# EAGLE board PCB_Xbee rev0.1 (EAGLE 8.4.3)
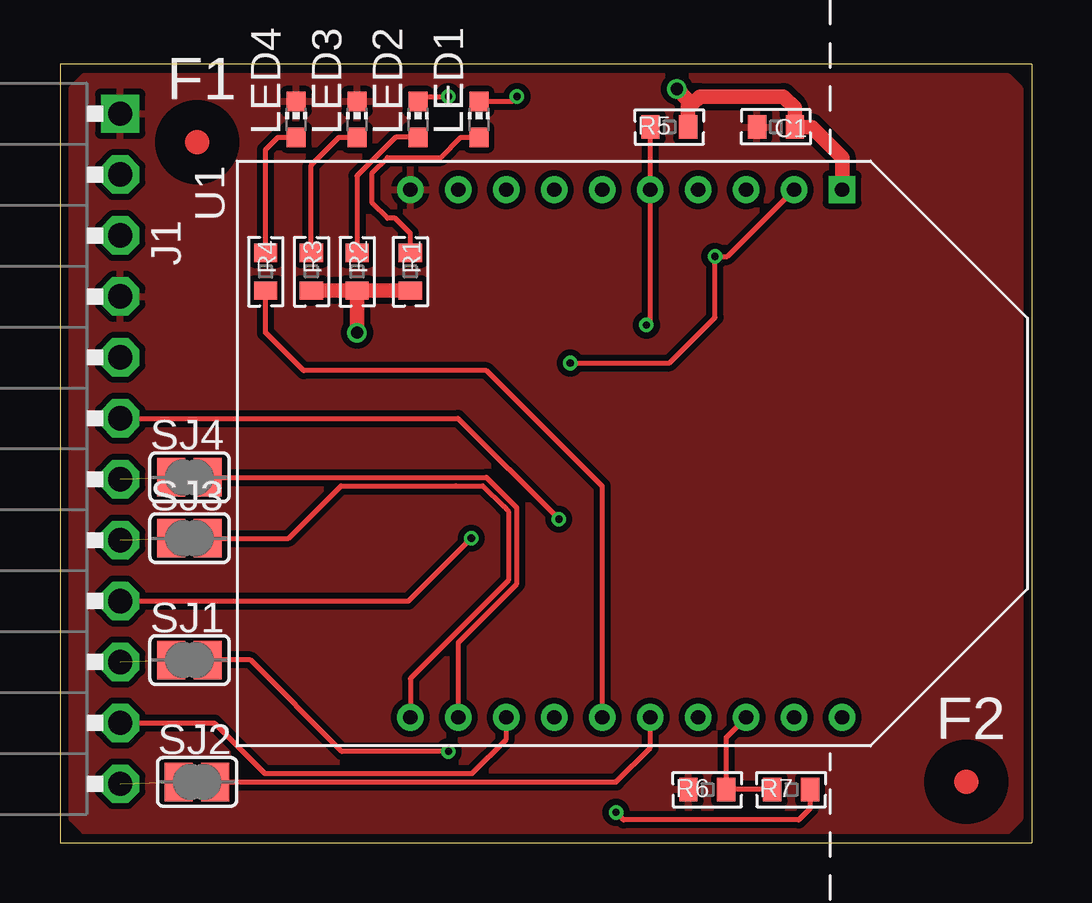
[diagram p0: board, top side]
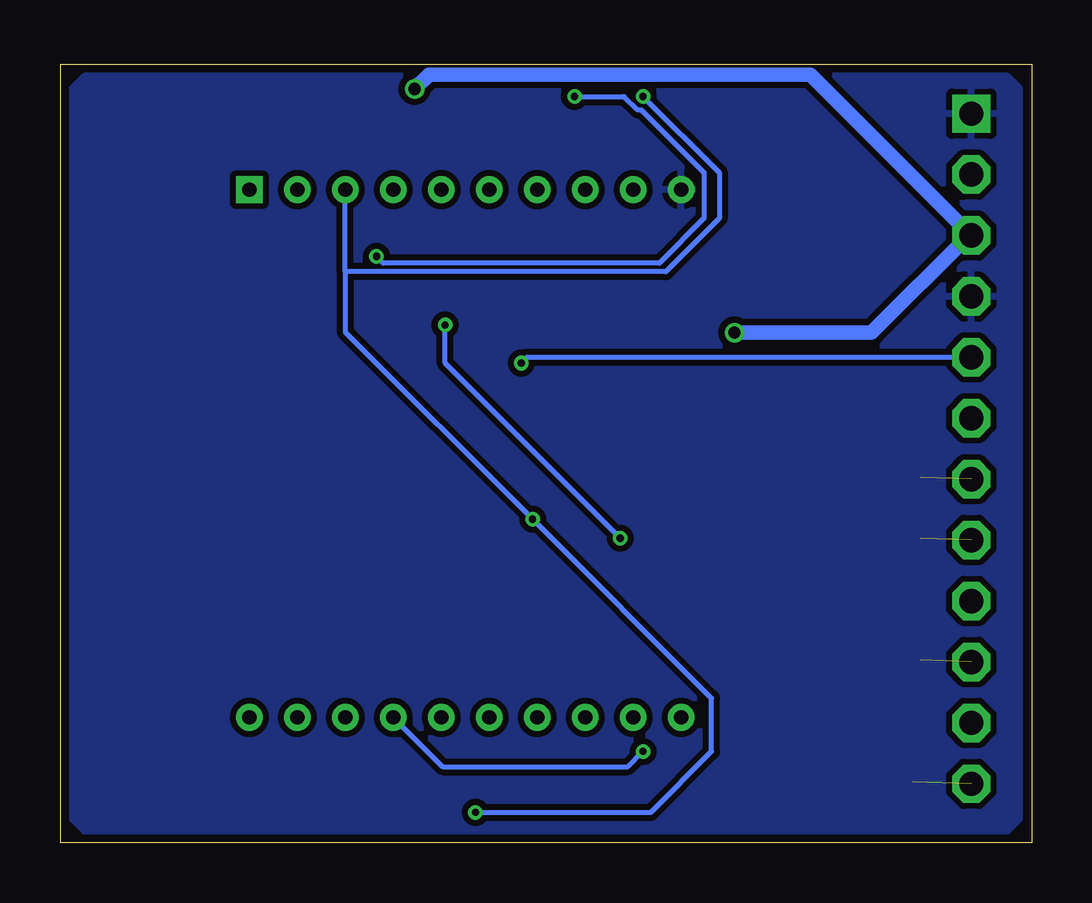
[diagram p1: board, bottom side, seen from below]

Size 40.5 x 32.46 mm. Coordinates in mm from the lower left corner, seen from the top.
Outline: 0,0 40.5,0 40.5,32.46 0,32.46 0,0
Copper layers (1+16): Top 0.035mm / dielectric 1.5mm / Bottom 0.035mm
Design rules "default *": minimum track width 6mil, minimum drill 15mil, track to track 6mil, track to pad 6mil, pad to pad 6mil, via to via 6mil, smd to smd 3mil, copper to edge 5mil, drill to drill 8mil, minimum pad ring 10mil, minimum via ring 6mil, stop-mask expansion 4mil, vias tented up to drill 15mil, thermal gap 10mil

## Footprints (pad centres in the part's own frame; a part is rotated, then mirrored left to right if it is on the bottom)
0603 = smd 0.762 x 0.965: 1 -0.787,0; 2 0.787,0
FA12-1W = drill 1.016 pad 1.6 square: 1 -13.97,3.81 | drill 1.016 pad 1.6 octagon: 2 -11.43,3.81; 3 -8.89,3.81; 4 -6.35,3.81; 5 -3.81,3.81; 6 -1.27,3.81; 7 1.27,3.81; 8 3.81,3.81; 9 6.35,3.81; 10 8.89,3.81; 11 11.43,3.81; 12 13.97,3.81
CHIP-LED0603 = smd 0.8 x 0.8: A 0,-0.75; C 0,0.75
SJ = smd 1.168 x 1.6: 1 -0.762,0; 2 0.762,0
XBP9B-DMUT-002 = drill 0.6 square: 1 -11,18 | drill 0.6: 2 -11,16; 3 -11,14; 4 -11,12; 5 -11,10; 6 -11,8; 7 -11,6; 8 -11,4; 9 -11,2; 10 -11,0; 11 11,0; 12 11,2; 13 11,4; 14 11,6; 15 11,8; 16 11,10; 17 11,12; 18 11,14; 19 11,16; 20 11,18

## Placement (x,y rotation side)
C1  10u/4V  [0603]  29.84,29.84 180 top
F1  [REF]  5.71,29.21 0 top
F2  [REF]  37.78,2.54 0 top
J1  FA12-1W  [FA12-1W]  -1.3,16.43 270 top
LED1  [CHIP-LED0603]  17.46,30.16 0 top
LED2  [CHIP-LED0603]  14.92,30.16 0 top
LED3  [CHIP-LED0603]  12.38,30.16 0 top
LED4  [CHIP-LED0603]  9.84,30.16 0 top
R1  1K  [0603]  14.61,23.81 270 top
R2  1K  [0603]  12.38,23.81 270 top
R3  1K  [0603]  10.48,23.81 270 top
R4  1K  [0603]  8.57,23.81 270 top
R5  1M  [0603]  25.4,29.84 0 top
R6  100K  [0603]  26.99,2.22 0 top
R7  470K  [0603]  30.48,2.22 0 top
SJ1  [SJ]  5.4,7.62 0 top
SJ2  [SJ]  5.71,2.54 0 top
SJ3  [SJ]  5.4,12.7 0 top
SJ4  [SJ]  5.4,15.24 0 top
U1  XBP9B-DMUT-002  [XBP9B-DMUT-002]  14.61,16.23 270 top

## Library data of the parts
C1 R1-R7 = discrete
F1 F2 = technol
J1 = CON-pinHeader-AON
LED1-LED4 = adafruit
SJ1-SJ4 = jumper
U1 = clackboard_lib

## Nets
+3.3V: C1.1 J1.3 R1.2 R2.2 R3.2 R5.2 U1.1
/WF_RST: J1.9 R5.1 U1.5
DGND: C1.2 J1.1 J1.4 LED3.C LED4.C R6.1 U1.10
DIO5: R4.2 U1.15
N$1: LED4.A R4.1
N$2: LED1.A R1.1
N$3: LED2.A R2.1
N$4: R6.2 R7.1 U1.18
N$8: LED3.A R3.1
N$9: SJ4.2 U1.12
N$10: SJ3.2 U1.11
N$11: SJ2.2 U1.16
N$12: SJ1.2 U1.17
RE0: J1.11 U1.13
RF1: J1.12 SJ2.1
U6RX: J1.5 LED1.C U1.2
U6TX: J1.6 LED2.C R7.2 U1.3
VBAT: J1.2
WF_CTS: J1.8 SJ3.1
WF_GP8: J1.10 SJ1.1
WF_RTS: J1.7 SJ4.1

## Tracks (layer width: path | path; a pad name or v marks a point on that pad's centre or on a via)
+3.3V  (via drill 0.51)
  Top 0.203: R5.2 26.19,30.63 26.35,30.8
  Top 0.61: v12.38,21.27 R2.2 | R1.2 R2.2 | R2.2 R3.2 | v25.72,31.43 26.19,30.96 R5.2 | 26.35,30.8 26.67,31.11 30.16,31.11 30.63,30.64 C1.1 31.34,29.84 32.6,28.57 U1.1
  Bottom 0.61: v12.38,21.27 6.67,21.27 2.62,25.32 J1.3 9.22,32.03 25.12,32.03 v25.72,31.43
/WF_RST  (via drill 0.3)
  Top 0.203: R5.1 U1.5 24.61,21.75 v24.45,21.59 | J1.9 14.53,10.08 v17.14,12.7
  Bottom 0.203: v17.14,12.7 24.45,20 v24.45,21.59
DGND
  pour Bottom (isolate 0.254): 0.5,31.46 1,31.96 39.5,31.96 40,31.46 40,1 39.5,0.5 1,0.5 0.5,1
  pour Top (isolate 0.254): 0.5,31.46 1,31.96 39.5,31.96 40,31.46 40,1 39.5,0.5 1,0.5 0.5,1
DIO5
  Top 0.203: U1.15 22.61,14.86 17.78,19.68 10.16,19.68 8.57,21.27 R4.2
N$1
  Top 0.203: R4.1 8.57,28.89 9.09,29.41 LED4.A
N$2
  Top 0.203: R1.1 14.61,25.4 13.97,26.04 13.65,26.04 13.02,26.67 13.02,27.94 13.65,28.57 15.88,28.57 16.71,29.41 LED1.A
N$3
  Top 0.203: LED2.A 13.99,29.41 12.38,27.81 R2.1
N$4
  Top 0.203: R7.1 R6.2 27.77,4.4 U1.18
N$8
  Top 0.203: R3.1 10.48,28.26 11.63,29.41 LED3.A
N$9
  Top 0.203: SJ4.2 17.78,15.24 19.05,13.97 19.05,10.79 16.61,8.35 U1.12
N$10
  Top 0.203: SJ3.2 9.53,12.7 11.71,14.88 16.51,14.88 17.63,14.88 18.48,14.04 | 18.48,14.04 18.64,13.88 | 18.48,14.04 18.69,13.82 18.69,10.94 14.61,6.85 U1.11
N$11
  Top 0.203: SJ2.2 23.18,2.54 24.61,3.97 U1.16
N$12  (via drill 0.3)
  Top 0.203: v16.19,3.81 11.75,3.81 7.94,7.62 SJ1.2
  Bottom 0.203: U1.17 24.55,3.17 16.83,3.17 v16.19,3.81
RE0
  Top 0.203: J1.11 6.43,5 8.53,2.9 17.18,2.9 18.61,4.32 U1.13
RF1  (1 unrouted)
U6RX  (via drill 0.3)
  Top 0.203: U1.2 27.82,24.45 v27.3,24.45 27.3,21.91 25.4,20 v21.27,20 | LED1.C 18.85,30.91 v19.05,31.11
  Bottom 0.203: v19.05,31.11 16.98,31.11 16.42,30.56 16.27,30.56 13.65,27.94 13.65,26.04 15.52,24.17 27.03,24.17 v27.3,24.45 | J1.5 21.04,20.24 v21.27,20
U6TX  (via drill 0.3)
  Top 0.203: R7.2 31.27,1.42 30.8,0.95 23.5,0.95 v23.18,1.27 | LED2.C 15.12,31.11 v16.19,31.11 | J1.6 16.59,17.7 v20.8,13.49
  Bottom 0.203: v23.18,1.27 15.88,1.27 13.34,3.81 13.34,6.03 v20.8,13.49 28.61,21.3 28.61,23.81 | 28.61,23.81 U1.3 | v16.19,31.11 13.02,27.94 13.02,26.04 15.24,23.81 28.61,23.81
WF_CTS  (1 unrouted)
WF_GP8  (1 unrouted)
WF_RTS  (1 unrouted)

## Text on the board
_tNames: (C) 2014 eLock Technologies LLC | R20 | R21 | M1 | WiFi module | R1.0